# Altium PCB LEDArrayFPC_24LED.PcbDoc (part 1 of 2)
Units mil, origin at the board's own origin, x right, y up, seen from the top; angles counter-clockwise.
Board outline 6000 x 4000 mil, 2 copper layers (Top Layer, Bottom Layer); 48 components, 25 nets, 486 pads, 144 vias.
Unrouted connection lines stored in the file: 29.
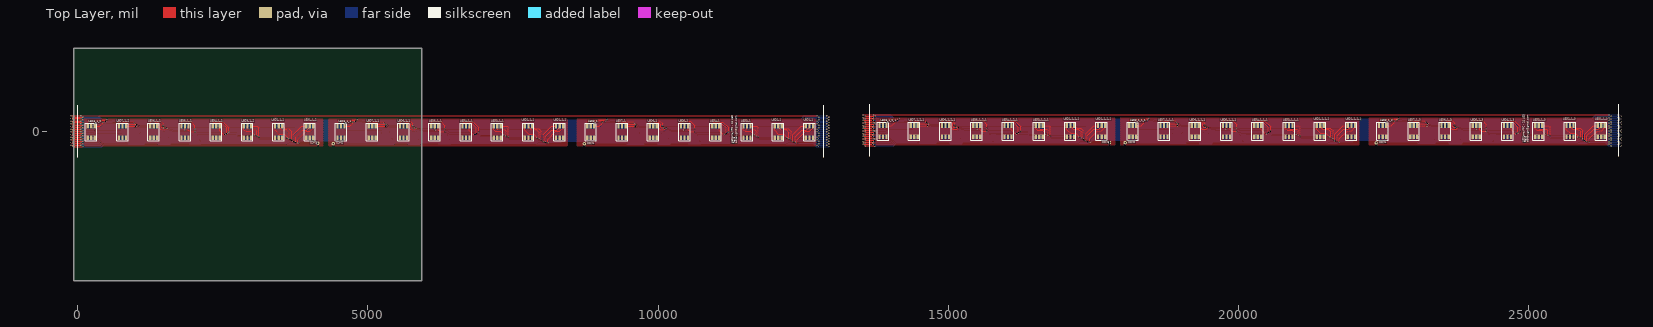
[diagram p0: Top Layer view]
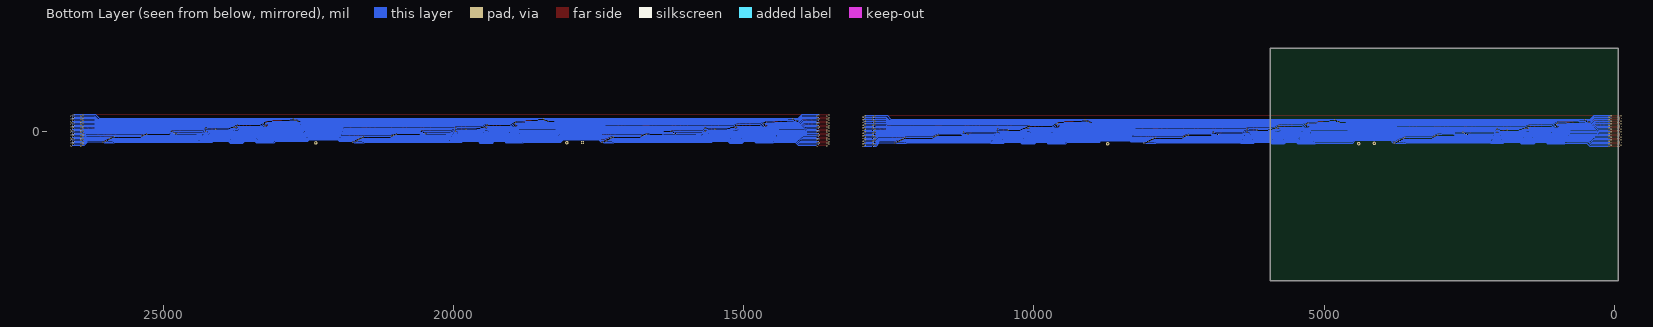
[diagram p1: Bottom Layer view, seen from below]

## Layer stack, top to bottom
Top Layer: signal copper 1.4
Dielectric: dielectric 12.6, FR-4, Dk 4.8
Bottom Layer: signal copper 1.4

## Board outline
-70,-2573.5 5930,-2573.5 5930,1426.5 -70,1426.5

## Design rules (kind name [scope] priority, off if disabled: settings)
Clearance [All] p1: gap=6
MinimumSolderMaskSliver [All] p1: minsoldermaskwidth=3.94
PolygonConnect [All] p1: connectstyle=Relief reliefconductorwidth=10 reliefentries=4 polygonreliefangle="90 Angle"
RoutingVias [All] p1: holewidth=28 width=50 viastyle="Through Hole" minholewidth=7.87 minwidth=19.68 maxholewidth=28 maxwidth=50
SilkscreenOverComponentPads [All] p1: minsilkscreentomaskgap=10
SolderMaskExpansion [All] p1: expansion=4
Width [All] p1: maxlimit=100 minlimit=6 preferedwidth=10 minimp=50.000000 maximp=50.000000 favimp=50.000000
26 further rules are at their usual default settings.

## Components (designator, comment, footprint, x,y, rotation, side; value= is the part's Value field where it differs from the comment)
LED1_1 "5050RGBLED" "5050 CRGBLED" 12608.32,-15.35 r90 top (schematic designator LED1)
LED1_1_1 "5050RGBLED" "5050 CRGBLED" 8303.75,-15.35 r90 top (schematic designator LED1)
LED1_1_1_1 "5050RGBLED" "5050 CRGBLED" 21948.75,-0.35 r90 top (schematic designator LED1)
LED1_1_2 "5050RGBLED" "5050 CRGBLED" 3999.19,-15.35 r90 top (schematic designator LED1)
LED1_1_2_1 "5050RGBLED" "5050 CRGBLED" 17644.19,-0.35 r90 top (schematic designator LED1)
LED1_1_3 "5050RGBLED" "5050 CRGBLED" 26253.32,-0.35 r90 top (schematic designator LED1)
LED2_1 "5050RGBLED" "5050 CRGBLED" 12070.25,-15.35 r90 top (schematic designator LED2)
LED2_1_1 "5050RGBLED" "5050 CRGBLED" 7765.68,-15.35 r90 top (schematic designator LED2)
LED2_1_1_1 "5050RGBLED" "5050 CRGBLED" 21410.68,-0.35 r90 top (schematic designator LED2)
LED2_1_2 "5050RGBLED" "5050 CRGBLED" 3461.11,-15.35 r90 top (schematic designator LED2)
LED2_1_2_1 "5050RGBLED" "5050 CRGBLED" 17106.11,-0.35 r90 top (schematic designator LED2)
LED2_1_3 "5050RGBLED" "5050 CRGBLED" 25715.25,-0.35 r90 top (schematic designator LED2)
LED3_1 "5050RGBLED" "5050 CRGBLED" 11532.18,-15.35 r90 top (schematic designator LED3)
LED3_1_1 "5050RGBLED" "5050 CRGBLED" 7227.61,-15.35 r90 top (schematic designator LED3)
LED3_1_1_1 "5050RGBLED" "5050 CRGBLED" 20872.61,-0.35 r90 top (schematic designator LED3)
LED3_1_2 "5050RGBLED" "5050 CRGBLED" 2923.04,-15.35 r90 top (schematic designator LED3)
LED3_1_2_1 "5050RGBLED" "5050 CRGBLED" 16568.04,-0.35 r90 top (schematic designator LED3)
LED3_1_3 "5050RGBLED" "5050 CRGBLED" 25177.18,-0.35 r90 top (schematic designator LED3)
LED4_1 "5050RGBLED" "5050 CRGBLED" 10994.11,-15.35 r90 top (schematic designator LED4)
LED4_1_1 "5050RGBLED" "5050 CRGBLED" 6689.54,-15.35 r90 top (schematic designator LED4)
LED4_1_1_1 "5050RGBLED" "5050 CRGBLED" 20334.54,-0.35 r90 top (schematic designator LED4)
LED4_1_2 "5050RGBLED" "5050 CRGBLED" 2384.97,-15.35 r90 top (schematic designator LED4)
LED4_1_2_1 "5050RGBLED" "5050 CRGBLED" 16029.97,-0.35 r90 top (schematic designator LED4)
LED4_1_3 "5050RGBLED" "5050 CRGBLED" 24639.11,-0.35 r90 top (schematic designator LED4)
LED5_1 "5050RGBLED" "5050 CRGBLED" 10456.04,-15.35 r90 top (schematic designator LED5)
LED5_1_1 "5050RGBLED" "5050 CRGBLED" 6151.47,-15.35 r90 top (schematic designator LED5)
LED5_1_1_1 "5050RGBLED" "5050 CRGBLED" 19796.47,-0.35 r90 top (schematic designator LED5)
LED5_1_2 "5050RGBLED" "5050 CRGBLED" 1846.9,-15.35 r90 top (schematic designator LED5)
LED5_1_2_1 "5050RGBLED" "5050 CRGBLED" 15491.9,-0.35 r90 top (schematic designator LED5)
LED5_1_3 "5050RGBLED" "5050 CRGBLED" 24101.04,-0.35 r90 top (schematic designator LED5)
LED6_1 "5050RGBLED" "5050 CRGBLED" 9917.97,-15.35 r90 top (schematic designator LED6)
LED6_1_1 "5050RGBLED" "5050 CRGBLED" 5613.4,-15.35 r90 top (schematic designator LED6)
LED6_1_1_1 "5050RGBLED" "5050 CRGBLED" 19258.4,-0.35 r90 top (schematic designator LED6)
LED6_1_2 "5050RGBLED" "5050 CRGBLED" 1308.83,-15.35 r90 top (schematic designator LED6)
LED6_1_2_1 "5050RGBLED" "5050 CRGBLED" 14953.83,-0.35 r90 top (schematic designator LED6)
LED6_1_3 "5050RGBLED" "5050 CRGBLED" 23562.97,-0.35 r90 top (schematic designator LED6)
LED7_1 "5050RGBLED" "5050 CRGBLED" 9379.9,-15.35 r90 top (schematic designator LED7)
LED7_1_1 "5050RGBLED" "5050 CRGBLED" 5075.33,-15.35 r90 top (schematic designator LED7)
LED7_1_1_1 "5050RGBLED" "5050 CRGBLED" 18720.33,-0.35 r90 top (schematic designator LED7)
LED7_1_2 "5050RGBLED" "5050 CRGBLED" 770.76,-15.35 r90 top (schematic designator LED7)
LED7_1_2_1 "5050RGBLED" "5050 CRGBLED" 14415.76,-0.35 r90 top (schematic designator LED7)
LED7_1_3 "5050RGBLED" "5050 CRGBLED" 23024.9,-0.35 r90 top (schematic designator LED7)
LED8_1 "5050RGBLED" "5050 CRGBLED" 8841.82,-15.35 r90 top (schematic designator LED8)
LED8_1_1 "5050RGBLED" "5050 CRGBLED" 4537.26,-15.35 r90 top (schematic designator LED8)
LED8_1_1_1 "5050RGBLED" "5050 CRGBLED" 18182.26,-0.35 r90 top (schematic designator LED8)
LED8_1_2 "5050RGBLED" "5050 CRGBLED" 232.69,-15.35 r90 top (schematic designator LED8)
LED8_1_2_1 "5050RGBLED" "5050 CRGBLED" 13877.69,-0.35 r90 top (schematic designator LED8)
LED8_1_3 "5050RGBLED" "5050 CRGBLED" 22486.82,-0.35 r90 top (schematic designator LED8)

## Footprints (in the part's own frame and the unit in brackets; to place one, negate y for a bottom-side part, rotate by r counter-clockwise, add the part's x,y. Pads: shape width x height; smd on the part's side, far side on the other; paste and mask are expansions set on the pad)
"5050 CRGBLED" [mm] "5050 RGBLED"
  rect 2x1 smd: 1(-2.5,1.55) 2(2.5,1.55) 3(-2.5,0) 4(2.5,0) 5(-2.5,-1.55) 6(2.5,-1.55)
  silkscreen extent -3.85,-2.45 3.9,2.55

## Part data
LED1_1 LED1_1_1 LED1_1_1_1 LED1_1_2 LED1_1_2_1 LED1_1_3 LED2_1 LED2_1_1 LED2_1_1_1 LED2_1_2 LED2_1_2_1 LED2_1_3 LED3_1 LED3_1_1 LED3_1_1_1 LED3_1_2 LED3_1_2_1 LED3_1_3 LED4_1 LED4_1_1 LED4_1_1_1 LED4_1_2 LED4_1_2_1 LED4_1_3 LED5_1 LED5_1_1 LED5_1_1_1 LED5_1_2 LED5_1_2_1 LED5_1_3 LED6_1 LED6_1_1 LED6_1_1_1 LED6_1_2 LED6_1_2_1 LED6_1_3 LED7_1 LED7_1_1 LED7_1_1_1 LED7_1_2 LED7_1_2_1 LED7_1_3 LED8_1 LED8_1_1 LED8_1_1_1 LED8_1_2 LED8_1_2_1 LED8_1_3: "5050 RGB LED"

## Free pads (board coordinates)
  round 59.06 hole 27.56: 1(4135,-209.72) 1(4404.25,-213.5) 1(8730,-216.88) 1(17780,-194.72) 1(18049.25,-198.5) 1(22375,-201.88)
  oval 31.5x23.62 hole 11.81: ""(-111,-241) ""(-111,-195) ""(-111,-149) ""(-111,-103) ""(-111,-57) ""(-111,-11) ""(-111,35) ""(-111,81) ""(-111,127) ""(-111,173) ""(-111,219) ""(-111,265) ""(-76,-264) ""(-76,-218) ""(-76,-172) ""(-76,-126) ""(-76,-80) ""(-76,-34) ""(-76,12) ""(-76,58) ""(-76,104) ""(-76,150) ""(-76,196) ""(-76,242) ""(54,-241) ""(54,-195) ""(54,-149) ""(54,-103) ""(54,-57) ""(54,-11) ""(54,35) ""(54,81) ""(54,127) ""(54,173) ""(54,219) ""(54,265) ""(89,-264) ""(89,-218) ""(89,-172) ""(89,-126) ""(89,-80) ""(89,-34) ""(89,12) ""(89,58) ""(89,104) ""(89,150) ""(89,196) ""(89,242) ""(12744,-241) ""(12744,-195) ""(12744,-149) ""(12744,-103) ""(12744,-57) ""(12744,-11) ""(12744,35) ""(12744,81) ""(12744,127) ""(12744,173) ""(12744,219) ""(12744,265) ""(12779,-264) ""(12779,-218) ""(12779,-172) ""(12779,-126) ""(12779,-80) ""(12779,-34) ""(12779,12) ""(12779,58) ""(12779,104) ""(12779,150) ""(12779,196) ""(12779,242) ""(12909,-241) ""(12909,-195) ""(12909,-149) ""(12909,-103) ""(12909,-57) ""(12909,-11) ""(12909,35) ""(12909,81) ""(12909,127) ""(12909,173) ""(12909,219) ""(12909,265) ""(12944,-264) ""(12944,-218) ""(12944,-172) ""(12944,-126) ""(12944,-80) ""(12944,-34) ""(12944,12) ""(12944,58) ""(12944,104) ""(12944,150) ""(12944,196) ""(12944,242) ""(13534,-226) ""(13534,-180) ""(13534,-134) ""(13534,-88) ""(13534,-42) ""(13534,4) ""(13534,50) ""(13534,96) ""(13534,142) ""(13534,188) ""(13534,234) ""(13534,280) ""(13569,-249) ""(13569,-203) ""(13569,-157) ""(13569,-111) ""(13569,-65) ""(13569,-19) ""(13569,27) ""(13569,73) ""(13569,119) ""(13569,165) ""(13569,211) ""(13569,257) ""(13699,-226) ""(13699,-180) ""(13699,-134) ""(13699,-88) ""(13699,-42) ""(13699,4) ""(13699,50) ""(13699,96) ""(13699,142) ""(13699,188) ""(13699,234) ""(13699,280) ""(13734,-249) ""(13734,-203) ""(13734,-157) ""(13734,-111) ""(13734,-65) ""(13734,-19) ""(13734,27) ""(13734,73) ""(13734,119) ""(13734,165) ""(13734,211) ""(13734,257) ""(26389,-226) ""(26389,-180) ""(26389,-134) ""(26389,-88) ""(26389,-42) ""(26389,4) ""(26389,50) ""(26389,96) ""(26389,142) ""(26389,188) ""(26389,234) ""(26389,280) ""(26424,-249) ""(26424,-203) ""(26424,-157) ""(26424,-111) ""(26424,-65) ""(26424,-19) ""(26424,27) ""(26424,73) ""(26424,119) ""(26424,165) ""(26424,211) ""(26424,257) ""(26554,-226) ""(26554,-180) ""(26554,-134) ""(26554,-88) ""(26554,-42) ""(26554,4) ""(26554,50) ""(26554,96) ""(26554,142) ""(26554,188) ""(26554,234) ""(26554,280) ""(26589,-249) ""(26589,-203) ""(26589,-157) ""(26589,-111) ""(26589,-65) ""(26589,-19) ""(26589,27) ""(26589,73) ""(26589,119) ""(26589,165) ""(26589,211) ""(26589,257)

## Via types
v1: diameter 23.62, hole 11.81, Top Layer to Bottom Layer, 144 vias

## Nets (pads, with @x,y where several pads share a name; then routed paths per layer and width w, separated by ;. In a path a pad name is that pad's centre, name@x,y a point inside that pad or via, vN(x,y) a via of type N, cw(c..) or ccw(c..) an arc to the next point about the centre after c; other vN are vias at no path point)
COM1: LED1_1.1 LED1_1.3 LED1_1.5 LED1_1_1.1 LED1_1_1.3 LED1_1_1.5 LED1_1_1_1.1 LED1_1_1_1.3 LED1_1_1_1.5 LED1_1_2.1 LED1_1_2.3 LED1_1_2.5 LED1_1_2_1.1 LED1_1_2_1.3 LED1_1_2_1.5 LED1_1_3.1 LED1_1_3.3 LED1_1_3.5 LED2_1.1 LED2_1.3 LED2_1.5 LED2_1_1.1 LED2_1_1.3 LED2_1_1.5 LED2_1_1_1.1 LED2_1_1_1.3 LED2_1_1_1.5 LED2_1_2.1 LED2_1_2.3 LED2_1_2.5 LED2_1_2_1.1 LED2_1_2_1.3 LED2_1_2_1.5 LED2_1_3.1 LED2_1_3.3 LED2_1_3.5 LED3_1.1 LED3_1.3 LED3_1.5 LED3_1_1.1 LED3_1_1.3 LED3_1_1.5 LED3_1_1_1.1 LED3_1_1_1.3 LED3_1_1_1.5 LED3_1_2.1 LED3_1_2.3 LED3_1_2.5 LED3_1_2_1.1 LED3_1_2_1.3 LED3_1_2_1.5 LED3_1_3.1 LED3_1_3.3 LED3_1_3.5 LED4_1.1 LED4_1.3 LED4_1.5 LED4_1_1.1 LED4_1_1.3 LED4_1_1.5 LED4_1_1_1.1 LED4_1_1_1.3 LED4_1_1_1.5 LED4_1_2.1 LED4_1_2.3 LED4_1_2.5 LED4_1_2_1.1 LED4_1_2_1.3 LED4_1_2_1.5 LED4_1_3.1 LED4_1_3.3 LED4_1_3.5 LED5_1.1 LED5_1.3 LED5_1.5 LED5_1_1.1 LED5_1_1.3 LED5_1_1.5 LED5_1_1_1.1 LED5_1_1_1.3 LED5_1_1_1.5 LED5_1_2.1 LED5_1_2.3 LED5_1_2.5 LED5_1_2_1.1 LED5_1_2_1.3 LED5_1_2_1.5 LED5_1_3.1 LED5_1_3.3 LED5_1_3.5 LED6_1.1 LED6_1.3 LED6_1.5 LED6_1_1.1 LED6_1_1.3 LED6_1_1.5 LED6_1_1_1.1 LED6_1_1_1.3 LED6_1_1_1.5 LED6_1_2.1 LED6_1_2.3 LED6_1_2.5 LED6_1_2_1.1 LED6_1_2_1.3 LED6_1_2_1.5 LED6_1_3.1 LED6_1_3.3 LED6_1_3.5 LED7_1.1 LED7_1.3 LED7_1.5 LED7_1_1.1 LED7_1_1.3 LED7_1_1.5 LED7_1_1_1.1 LED7_1_1_1.3 LED7_1_1_1.5 LED7_1_2.1 LED7_1_2.3 LED7_1_2.5 LED7_1_2_1.1 LED7_1_2_1.3 LED7_1_2_1.5 LED7_1_3.1 LED7_1_3.3 LED7_1_3.5 LED8_1.1 LED8_1.3 LED8_1.5 LED8_1_1.1 LED8_1_1.3 LED8_1_1.5 LED8_1_1_1.1 LED8_1_1_1.3 LED8_1_1_1.5 LED8_1_2.1 LED8_1_2.3 LED8_1_2.5 LED8_1_2_1.1 LED8_1_2_1.3 LED8_1_2_1.5 LED8_1_3.1 LED8_1_3.3 LED8_1_3.5 pad.1 | length 42.6
  Top Layer w10: LED2_1_2.5@3522.14,-120.87 LED2_1_2.5@3522.14,-113.77 ; LED2_1_1.5@7826.7,-120.87 LED2_1_1.5@7826.71,-113.77 ; LED2_1.5@12131.27,-120.87 LED2_1.5@12131.27,-113.77 ; LED2_1_2_1.5@17167.14,-105.87 LED2_1_2_1.5@17167.14,-98.77 ; LED2_1_1_1.5@21471.71,-105.87 LED2_1_1_1.5@21471.71,-98.77 ; LED2_1_3.5@25776.27,-105.87 LED2_1_3.5@25776.27,-98.77
L1: LED1_1.6 LED1_1_1.6 LED1_1_1_1.6 LED1_1_2.6 LED1_1_2_1.6 LED1_1_3.6 pad.@89,-264 pad.@12779,-264 pad.@12944,-264 pad.@13569,-249 pad.@13734,-249 pad.@26424,-249 pad.@26589,-249 pad.@-76,-264 | length 29243.6
  Top Layer w10: 39,-264 pad.@89,-264 ; v1(3793.09,-203.5) 3793.09,-147.34 3935.83,-4.6 4004.85,-4.6 4060.21,50.76 LED1_1_2.6@4060.21,83.08 ; v1(8097.66,-203.5) 8097.66,-147.34 8240.4,-4.6 8309.42,-4.6 8364.78,50.76 LED1_1_1.6@8364.78,83.08 ; v1(12402.22,-203.5) 12402.22,-147.34 12544.97,-4.6 12613.99,-4.6 12669.34,50.76 LED1_1.6@12669.34,83.08 ; 13684,-249 pad.@13734,-249 ; v1(17438.09,-188.5) 17438.09,-132.34 17580.83,10.4 17649.85,10.4 17705.21,65.76 LED1_1_2_1.6@17705.21,98.08 ; v1(21742.66,-188.5) 21742.66,-132.34 21885.4,10.4 21954.42,10.4 22009.78,65.76 LED1_1_1_1.6@22009.78,98.08 ; v1(26047.22,-188.5) 26047.22,-132.34 26189.97,10.4 26258.99,10.4 26314.35,65.76 LED1_1_3.6@26314.34,98.08
  Top Layer w15: pad.@-76,-264 39,-264 ; pad.@13569,-249 13684,-249
  Bottom Layer w10: pad.@89,-264 411.61,-264 463.11,-212.5 850.91,-212.5 859.76,-221.34 1141.56,-221.34 1164.4,-198.5 1358.85,-198.5 1388.69,-228.34 1591.52,-228.34 1621.37,-198.5 1899.73,-198.5 1917.73,-216.5 2122.48,-216.5 2129.49,-209.5 2130.49,-210.5 3594.09,-210.5 3604.09,-220.5 3756.35,-220.5 3773.35,-203.5 v1(3793.09,-203.5) 3811,-203.5 3846,-168.5 4472.39,-168.5 4516.39,-212.5 5155.48,-212.5 5164.33,-221.34 5446.13,-221.34 5468.97,-198.5 5663.42,-198.5 5693.26,-228.34 5896.09,-228.34 5925.93,-198.5 6204.3,-198.5 6222.3,-216.5 6427.05,-216.5 6434.05,-209.5 6435.05,-210.5 7898.66,-210.5 7908.66,-220.5 8060.92,-220.5 8077.92,-203.5 v1(8097.66,-203.5) 8097.66,-200.5 8103.66,-194.5 8322.14,-194.5 8343.14,-173.5 8853.65,-173.5 8876.36,-196.22 9434,-196.22 9459.13,-221.34 9750.69,-221.34 9773.54,-198.5 9967.98,-198.5 9997.83,-228.34 10200.66,-228.34 10230.5,-198.5 10508.87,-198.5 10526.87,-216.5 10731.62,-216.5 10738.62,-209.5 10739.62,-210.5 12203.22,-210.5 12213.22,-220.5 12365.48,-220.5 12382.48,-203.5 v1(12402.22,-203.5) 12670.3,-203.5 12730.61,-263.81 12778.81,-263.81 pad.@12779,-264 ; 12894,-264 pad.@12944,-264 ; pad.@13734,-249 14056.61,-249 14108.11,-197.5 14495.91,-197.5 14504.76,-206.34 14786.56,-206.34 14809.4,-183.5 15003.85,-183.5 15033.69,-213.34 15236.52,-213.34 15266.37,-183.5 15544.73,-183.5 15562.73,-201.5 15767.48,-201.5 15774.49,-194.5 15775.49,-195.5 17239.09,-195.5 17249.09,-205.5 17401.35,-205.5 17418.35,-188.5 v1(17438.09,-188.5) 17456,-188.5 17491,-153.5 18117.39,-153.5 18161.39,-197.5 18800.48,-197.5 18809.33,-206.34 19091.13,-206.34 19113.97,-183.5 19308.42,-183.5 19338.26,-213.34 19541.09,-213.34 19570.93,-183.5 19849.3,-183.5 19867.3,-201.5 20072.05,-201.5 20079.05,-194.5 20080.05,-195.5 21543.66,-195.5 21553.66,-205.5 21705.92,-205.5 21722.92,-188.5 v1(21742.66,-188.5) 21742.66,-185.5 21748.66,-179.5 21967.14,-179.5 21988.14,-158.5 22498.65,-158.5 22521.36,-181.22 23079,-181.22 23104.13,-206.34 23395.69,-206.34 23418.54,-183.5 23612.98,-183.5 23642.83,-213.34 23845.66,-213.34 23875.5,-183.5 24153.87,-183.5 24171.87,-201.5 24376.62,-201.5 24383.62,-194.5 24384.62,-195.5 25848.22,-195.5 25858.22,-205.5 26010.48,-205.5 26027.48,-188.5 v1(26047.22,-188.5) 26315.3,-188.5 26375.61,-248.81 26423.81,-248.81 pad.@26424,-249 ; 26539,-249 pad.@26589,-249
  Bottom Layer w15: pad.@12779,-264 12894,-264 ; pad.@26424,-249 26539,-249
L2: LED1_1.4 LED1_1_1.4 LED1_1_1_1.4 LED1_1_2.4 LED1_1_2_1.4 LED1_1_3.4 pad.@54,-241 pad.@12744,-241 pad.@12909,-241 pad.@13534,-226 pad.@13699,-226 pad.@26389,-226 pad.@26554,-226 pad.@-111,-241 | length 29216.6
  Top Layer w10: pad.@-111,-241 -56,-241 ; v1(3752.09,-192.5) 3752.09,-95.36 3866.86,19.41 3949.1,19.41 3999.19,69.49 LED1_1_2.4@3999.18,83.08 ; v1(8056.66,-192.5) 8056.66,-95.36 8171.43,19.41 8253.67,19.41 8303.75,69.49 LED1_1_1.4@8303.75,83.08 ; v1(12361.22,-192.5) 12361.22,-95.36 12476,19.41 12558.24,19.41 12608.32,69.49 LED1_1.4@12608.32,83.08 ; pad.@13534,-226 13589,-226 ; v1(17397.09,-177.5) 17397.09,-80.36 17511.86,34.41 17594.1,34.41 17644.19,84.49 LED1_1_2_1.4@17644.18,98.08 ; v1(21701.66,-177.5) 21701.66,-80.36 21816.43,34.41 21898.67,34.41 21948.75,84.49 LED1_1_1_1.4@21948.75,98.08 ; v1(26006.22,-177.5) 26006.22,-80.36 26121,34.41 26203.24,34.41 26253.32,84.49 LED1_1_3.4@26253.32,98.08
  Top Layer w15: -56,-241 pad.@54,-241 ; 13589,-226 pad.@13699,-226
  Bottom Layer w10: pad.@54,-241 396.61,-241 443.11,-194.5 820.09,-194.5 835.09,-179.5 840.54,-179.5 866.38,-205.34 1134.93,-205.34 1157.77,-182.5 1365.48,-182.5 1395.32,-212.34 1584.9,-212.34 1614.74,-182.5 1906.36,-182.5 1924.36,-200.5 2115.86,-200.5 2122.86,-193.5 2136.11,-193.5 2137.11,-194.5 3624.09,-194.5 3634.09,-204.5 3740.09,-204.5 v1(3752.09,-192.5) 3769.09,-175.5 3816.09,-175.5 3828.09,-163.5 3828.37,-163.5 3839.37,-152.5 4481.2,-152.5 4523.2,-194.5 5160.11,-194.5 5170.95,-205.34 5439.5,-205.34 5462.34,-182.5 5670.04,-182.5 5699.89,-212.34 5889.46,-212.34 5919.31,-182.5 6210.93,-182.5 6228.93,-200.5 6420.42,-200.5 6427.42,-193.5 6440.68,-193.5 6441.68,-194.5 7928.66,-194.5 7938.66,-204.5 8044.66,-204.5 v1(8056.66,-192.5) 8056.66,-184.5 8062.66,-178.5 8315.51,-178.5 8336.51,-157.5 8860.28,-157.5 8882.99,-180.22 9450,-180.22 9475.13,-205.34 9744.07,-205.34 9766.91,-182.5 9974.61,-182.5 10004.45,-212.34 10194.03,-212.34 10223.88,-182.5 10515.49,-182.5 10533.49,-200.5 10724.99,-200.5 10731.99,-193.5 10745.25,-193.5 10746.25,-194.5 12233.22,-194.5 12243.22,-204.5 12349.22,-204.5 v1(12361.22,-192.5) 12378.22,-175.5 12665.68,-175.5 12723.99,-233.81 12736.81,-233.81 pad.@12744,-241 12799,-241 ; pad.@13699,-226 14041.61,-226 14088.11,-179.5 14465.09,-179.5 14480.09,-164.5 14485.54,-164.5 14511.38,-190.34 14779.93,-190.34 14802.77,-167.5 15010.48,-167.5 15040.32,-197.34 15229.9,-197.34 15259.74,-167.5 15551.36,-167.5 15569.36,-185.5 15760.86,-185.5 15767.86,-178.5 15781.11,-178.5 15782.11,-179.5 17269.09,-179.5 17279.09,-189.5 17385.09,-189.5 v1(17397.09,-177.5) 17414.09,-160.5 17461.09,-160.5 17473.09,-148.5 17473.37,-148.5 17484.37,-137.5 18126.2,-137.5 18168.2,-179.5 18805.11,-179.5 18815.95,-190.34 19084.5,-190.34 19107.34,-167.5 19315.04,-167.5 19344.89,-197.34 19534.46,-197.34 19564.31,-167.5 19855.93,-167.5 19873.93,-185.5 20065.42,-185.5 20072.42,-178.5 20085.68,-178.5 20086.68,-179.5 21573.66,-179.5 21583.66,-189.5 21689.66,-189.5 v1(21701.66,-177.5) 21701.66,-169.5 21707.66,-163.5 21960.51,-163.5 21981.51,-142.5 22505.28,-142.5 22527.99,-165.22 23095,-165.22 23120.13,-190.34 23389.07,-190.34 23411.91,-167.5 23619.61,-167.5 23649.45,-197.34 23839.03,-197.34 23868.88,-167.5 24160.49,-167.5 24178.49,-185.5 24369.99,-185.5 24376.99,-178.5 24390.25,-178.5 24391.25,-179.5 25878.22,-179.5 25888.22,-189.5 25994.22,-189.5 v1(26006.22,-177.5) 26023.22,-160.5 26310.68,-160.5 26368.99,-218.81 26381.81,-218.81 pad.@26389,-226 26444,-226
  Bottom Layer w15: 12799,-241 pad.@12909,-241 ; 26444,-226 pad.@26554,-226
L3: LED1_1.2 LED1_1_1.2 LED1_1_1_1.2 LED1_1_2.2 LED1_1_2_1.2 LED1_1_3.2 pad.@89,-218 pad.@12779,-218 pad.@12944,-218 pad.@13569,-203 pad.@13734,-203 pad.@26424,-203 pad.@26589,-203 pad.@-76,-218 | length 29020.8
  Top Layer w10: 39,-218 pad.@89,-218 ; v1(3715.09,-178.5) 3715.09,-63.36 3860.86,82.41 3937.49,82.41 LED1_1_2.2@3938.16,83.08 ; v1(8019.66,-178.5) 8019.66,-63.36 8165.43,82.41 8242.06,82.41 LED1_1_1.2@8242.73,83.08 ; v1(12324.22,-178.5) 12324.22,-63.36 12470,82.41 12546.63,82.41 LED1_1.2@12547.3,83.08 ; 13684,-203 pad.@13734,-203 ; v1(17360.09,-163.5) 17360.09,-48.36 17505.86,97.41 17582.49,97.41 LED1_1_2_1.2@17583.16,98.08 ; v1(21664.66,-163.5) 21664.66,-48.36 21810.43,97.41 21887.06,97.41 LED1_1_1_1.2@21887.73,98.08 ; v1(25969.22,-163.5) 25969.22,-48.36 26115,97.41 26191.63,97.41 LED1_1_3.2@26192.3,98.08
  Top Layer w15: pad.@-76,-218 39,-218 ; pad.@13569,-203 13684,-203
  Bottom Layer w10: pad.@89,-218 388.61,-218 428.11,-178.5 813.46,-178.5 828.46,-163.5 847.17,-163.5 873.01,-189.34 1128.3,-189.34 1151.15,-166.5 1372.1,-166.5 1401.95,-196.34 1578.27,-196.34 1608.11,-166.5 1912.98,-166.5 1929.98,-183.5 2110.23,-183.5 2124.23,-169.5 2134.74,-169.5 2143.74,-178.5 v1(3715.09,-178.5) 3740.09,-153.5 3815.46,-153.5 3821.46,-147.5 3821.75,-147.5 3832.75,-136.5 4492.49,-136.5 4534.49,-178.5 5166.74,-178.5 5177.58,-189.34 5432.87,-189.34 5455.71,-166.5 5676.67,-166.5 5706.51,-196.34 5882.84,-196.34 5912.68,-166.5 6217.55,-166.5 6234.55,-183.5 6414.8,-183.5 6428.8,-169.5 6439.31,-169.5 6448.31,-178.5 v1(8019.66,-178.5) 8019.66,-175.5 8032.66,-162.5 8308.88,-162.5 8329.88,-141.5 8866.9,-141.5 8888.94,-163.53 9455.95,-163.53 9481.75,-189.34 9737.44,-189.34 9760.28,-166.5 9981.24,-166.5 10011.08,-196.34 10187.41,-196.34 10217.25,-166.5 10522.12,-166.5 10539.12,-183.5 10719.37,-183.5 10733.37,-169.5 10743.88,-169.5 10752.88,-178.5 v1(12324.22,-178.5) 12343.22,-159.5 12672.3,-159.5 12730.61,-217.81 12778.81,-217.81 pad.@12779,-218 ; 12894,-218 pad.@12944,-218 ; pad.@13734,-203 14033.61,-203 14073.11,-163.5 14458.46,-163.5 14473.46,-148.5 14492.17,-148.5 14518.01,-174.34 14773.3,-174.34 14796.15,-151.5 15017.1,-151.5 15046.95,-181.34 15223.27,-181.34 15253.11,-151.5 15557.98,-151.5 15574.98,-168.5 15755.23,-168.5 15769.23,-154.5 15779.74,-154.5 15788.74,-163.5 v1(17360.09,-163.5) 17385.09,-138.5 17460.46,-138.5 17466.46,-132.5 17466.75,-132.5 17477.75,-121.5 18137.49,-121.5 18179.49,-163.5 18811.74,-163.5 18822.58,-174.34 19077.87,-174.34 19100.71,-151.5 19321.67,-151.5 19351.51,-181.34 19527.84,-181.34 19557.68,-151.5 19862.55,-151.5 19879.55,-168.5 20059.8,-168.5 20073.8,-154.5 20084.31,-154.5 20093.31,-163.5 v1(21664.66,-163.5) 21664.66,-160.5 21677.66,-147.5 21953.88,-147.5 21974.88,-126.5 22511.9,-126.5 22533.94,-148.53 23100.95,-148.53 23126.75,-174.34 23382.44,-174.34 23405.28,-151.5 23626.24,-151.5 23656.08,-181.34 23832.41,-181.34 23862.25,-151.5 24167.12,-151.5 24184.12,-168.5 24364.37,-168.5 24378.37,-154.5 24388.88,-154.5 24397.88,-163.5 v1(25969.22,-163.5) 25988.22,-144.5 26317.3,-144.5 26375.61,-202.81 26423.81,-202.81 pad.@26424,-203 ; 26539,-203 pad.@26589,-203
  Bottom Layer w15: pad.@12779,-218 12894,-218 ; pad.@26424,-203 26539,-203
L4: LED2_1.6 LED2_1_1.6 LED2_1_1_1.6 LED2_1_2.6 LED2_1_2_1.6 LED2_1_3.6 pad.@54,-195 pad.@12744,-195 pad.@12909,-195 pad.@13534,-180 pad.@13699,-180 pad.@26389,-180 pad.@26554,-180 pad.@-111,-195 | length 28687.4
  Top Layer w10: pad.@-111,-195 -56,-195 ; LED2_1_2.6@3522.14,83.08 3566.81,38.41 3637.47,38.41 3683.09,-7.21 v1(3683.09,-155.5) ; LED2_1_1.6@7826.71,83.08 7871.38,38.41 7942.04,38.41 7987.66,-7.21 v1(7987.66,-155.5) ; LED2_1.6@12131.27,83.08 12175.94,38.41 12246.61,38.41 12292.22,-7.21 v1(12292.22,-155.5) ; pad.@13534,-180 13589,-180 ; LED2_1_2_1.6@17167.14,98.08 17211.81,53.41 17282.47,53.41 17328.09,7.79 v1(17328.09,-140.5) ; LED2_1_1_1.6@21471.71,98.08 21516.38,53.41 21587.04,53.41 21632.66,7.79 v1(21632.66,-140.5) ; LED2_1_3.6@25776.27,98.08 25820.94,53.41 25891.61,53.41 25937.22,7.79 v1(25937.22,-140.5)
  Top Layer w15: -56,-195 pad.@54,-195 ; 13589,-180 pad.@13699,-180
  Bottom Layer w10: pad.@54,-195 370.61,-195 403.11,-162.5 806.83,-162.5 821.83,-147.5 853.8,-147.5 879.64,-173.34 1121.68,-173.34 1144.52,-150.5 1378.73,-150.5 1408.57,-180.34 1571.64,-180.34 1601.48,-150.5 1919.61,-150.5 1936.61,-167.5 2103.6,-167.5 2117.6,-153.5 2141.37,-153.5 2149.37,-161.5 3677.09,-161.5 v1(3683.09,-155.5) 3701.09,-137.5 3808.83,-137.5 3814.83,-131.5 3815.12,-131.5 3826.12,-120.5 4499.12,-120.5 4541.12,-162.5 5173.37,-162.5 5184.21,-173.34 5426.24,-173.34 5449.09,-150.5 5683.3,-150.5 5713.14,-180.34 5876.21,-180.34 5906.05,-150.5 6224.18,-150.5 6241.18,-167.5 6408.17,-167.5 6422.17,-153.5 6445.93,-153.5 6453.93,-161.5 7981.66,-161.5 v1(7987.66,-155.5) 7996.66,-146.5 8302.25,-146.5 8323.25,-125.5 8874.16,-125.5 8896.16,-147.5 9462.93,-147.5 9488.78,-173.34 9730.81,-173.34 9753.65,-150.5 9987.87,-150.5 10017.71,-180.34 10180.78,-180.34 10210.62,-150.5 10528.75,-150.5 10545.75,-167.5 10712.74,-167.5 10726.74,-153.5 10750.5,-153.5 10758.5,-161.5 12286.22,-161.5 v1(12292.22,-155.5) 12304.22,-143.5 12679.68,-143.5 12723.99,-187.81 12736.81,-187.81 pad.@12744,-195 12799,-195 ; pad.@13699,-180 14015.61,-180 14048.11,-147.5 14451.83,-147.5 14466.83,-132.5 14498.8,-132.5 14524.64,-158.34 14766.68,-158.34 14789.52,-135.5 15023.73,-135.5 15053.57,-165.34 15216.64,-165.34 15246.48,-135.5 15564.61,-135.5 15581.61,-152.5 15748.6,-152.5 15762.6,-138.5 15786.37,-138.5 15794.37,-146.5 17322.09,-146.5 v1(17328.09,-140.5) 17346.09,-122.5 17453.83,-122.5 17459.83,-116.5 17460.12,-116.5 17471.12,-105.5 18144.12,-105.5 18186.12,-147.5 18818.37,-147.5 18829.21,-158.34 19071.24,-158.34 19094.09,-135.5 19328.3,-135.5 19358.14,-165.34 19521.21,-165.34 19551.05,-135.5 19869.18,-135.5 19886.18,-152.5 20053.17,-152.5 20067.17,-138.5 20090.93,-138.5 20098.93,-146.5 21626.66,-146.5 v1(21632.66,-140.5) 21641.66,-131.5 21947.25,-131.5 21968.25,-110.5 22519.16,-110.5 22541.16,-132.5 23107.93,-132.5 23133.78,-158.34 23375.81,-158.34 23398.65,-135.5 23632.87,-135.5 23662.71,-165.34 23825.78,-165.34 23855.62,-135.5 24173.75,-135.5 24190.75,-152.5 24357.74,-152.5 24371.74,-138.5 24395.5,-138.5 24403.5,-146.5 25931.22,-146.5 v1(25937.22,-140.5) 25949.22,-128.5 26324.68,-128.5 26368.99,-172.81 26381.81,-172.81 pad.@26389,-180 26444,-180
  Bottom Layer w15: 12799,-195 pad.@12909,-195 ; 26444,-180 pad.@26554,-180
L5: LED2_1.4 LED2_1_1.4 LED2_1_1_1.4 LED2_1_2.4 LED2_1_2_1.4 LED2_1_3.4 pad.@89,-172 pad.@12779,-172 pad.@12944,-172 pad.@13569,-157 pad.@13734,-157 pad.@26424,-157 pad.@26589,-157 pad.@-76,-172 | length 28658.9
  Top Layer w10: 39,-172 pad.@89,-172 ; LED2_1_2.4@3461.11,83.08 3491.45,52.74 3491.45,39.15 3508.19,22.41 3596.84,22.41 3645.84,-26.59 3645.84,-130.26 v1(3647.09,-131.5) ; LED2_1_1.4@7765.68,83.08 7796.02,52.74 7796.02,39.15 7812.76,22.41 7901.41,22.41 7950.41,-26.59 7950.41,-130.26 v1(7951.66,-131.5) ; LED2_1.4@12070.25,83.08 12100.59,52.74 12100.59,39.15 12117.33,22.41 12205.98,22.41 12254.98,-26.59 12254.98,-130.26 v1(12256.22,-131.5) ; 13684,-157 pad.@13734,-157 ; LED2_1_2_1.4@17106.11,98.08 17136.45,67.74 17136.45,54.15 17153.19,37.41 17241.84,37.41 17290.84,-11.59 17290.84,-115.26 v1(17292.09,-116.5) ; LED2_1_1_1.4@21410.68,98.08 21441.02,67.74 21441.02,54.15 21457.76,37.41 21546.41,37.41 21595.41,-11.59 21595.41,-115.26 v1(21596.66,-116.5) ; LED2_1_3.4@25715.25,98.08 25745.59,67.74 25745.59,54.15 25762.33,37.41 25850.98,37.41 25899.98,-11.59 25899.98,-115.26 v1(25901.22,-116.5)
  Top Layer w15: pad.@-76,-172 39,-172 ; pad.@13569,-157 13684,-157
  Bottom Layer w10: pad.@89,-172 357.61,-172 383.11,-146.5 800.21,-146.5 815.21,-131.5 860.42,-131.5 886.27,-157.34 1115.05,-157.34 1137.89,-134.5 1385.36,-134.5 1415.2,-164.34 1565.01,-164.34 1594.86,-134.5 1926.24,-134.5 1943.24,-151.5 2096.97,-151.5 2110.97,-137.5 2147.99,-137.5 2155.99,-145.5 3623.97,-145.5 3637.97,-131.5 v1(3647.09,-131.5) 3657.09,-121.5 3802.21,-121.5 3808.21,-115.5 3808.49,-115.5 3819.49,-104.5 4505.75,-104.5 4547.75,-146.5 5179.99,-146.5 5190.83,-157.34 5419.62,-157.34 5442.46,-134.5 5689.93,-134.5 5719.77,-164.34 5869.58,-164.34 5899.42,-134.5 6230.81,-134.5 6247.81,-151.5 6401.54,-151.5 6415.54,-137.5 6452.56,-137.5 6460.56,-145.5 7928.54,-145.5 7942.54,-131.5 v1(7951.66,-131.5) 7952.66,-130.5 8295.63,-130.5 8316.63,-109.5 8881,-109.5 8903,-131.5 9469.56,-131.5 9495.4,-157.34 9724.18,-157.34 9747.03,-134.5 9994.49,-134.5 10024.34,-164.34 10174.15,-164.34 10203.99,-134.5 10535.38,-134.5 10552.38,-151.5 10706.11,-151.5 10720.11,-137.5 10757.13,-137.5 10765.13,-145.5 12233.11,-145.5 12247.11,-131.5 v1(12256.22,-131.5) 12261.22,-126.5 12685.3,-126.5 12730.61,-171.81 12778.81,-171.81 pad.@12779,-172 ; 12894,-172 pad.@12944,-172 ; pad.@13734,-157 14002.61,-157 14028.11,-131.5 14445.21,-131.5 14460.21,-116.5 14505.42,-116.5 14531.27,-142.34 14760.05,-142.34 14782.89,-119.5 15030.36,-119.5 15060.2,-149.34 15210.01,-149.34 15239.86,-119.5 15571.24,-119.5 15588.24,-136.5 15741.97,-136.5 15755.97,-122.5 15792.99,-122.5 15800.99,-130.5 17268.97,-130.5 17282.97,-116.5 v1(17292.09,-116.5) 17302.09,-106.5 17447.21,-106.5 17453.21,-100.5 17453.49,-100.5 17464.49,-89.5 18150.75,-89.5 18192.75,-131.5 18824.99,-131.5 18835.83,-142.34 19064.62,-142.34 19087.46,-119.5 19334.93,-119.5 19364.77,-149.34 19514.58,-149.34 19544.42,-119.5 19875.81,-119.5 19892.81,-136.5 20046.54,-136.5 20060.54,-122.5 20097.56,-122.5 20105.56,-130.5 21573.54,-130.5 21587.54,-116.5 v1(21596.66,-116.5) 21597.66,-115.5 21940.63,-115.5 21961.63,-94.5 22526,-94.5 22548,-116.5 23114.56,-116.5 23140.4,-142.34 23369.18,-142.34 23392.03,-119.5 23639.49,-119.5 23669.34,-149.34 23819.15,-149.34 23848.99,-119.5 24180.38,-119.5 24197.38,-136.5 24351.11,-136.5 24365.11,-122.5 24402.13,-122.5 24410.13,-130.5 25878.11,-130.5 25892.11,-116.5 v1(25901.22,-116.5) 25906.22,-111.5 26330.3,-111.5 26375.61,-156.81 26423.81,-156.81 pad.@26424,-157 ; 26539,-157 pad.@26589,-157
  Bottom Layer w15: pad.@12779,-172 12894,-172 ; pad.@26424,-157 26539,-157
L6: LED2_1.2 LED2_1_1.2 LED2_1_1_1.2 LED2_1_2.2 LED2_1_2_1.2 LED2_1_3.2 pad.@54,-149 pad.@12744,-149 pad.@12909,-149 pad.@13534,-134 pad.@13699,-134 pad.@26389,-134 pad.@26554,-134 pad.@-111,-149 | length 28606.1
  Top Layer w10: pad.@-111,-149 -56,-149 ; LED2_1_2.2@3400.09,83.08 3400.09,12.18 3464.86,-52.59 3555,-52.59 3607.09,-104.68 v1(3607.09,-114.5) ; LED2_1_1.2@7704.66,83.08 7704.66,12.18 7769.43,-52.59 7859.57,-52.59 7911.66,-104.68 v1(7911.66,-114.5) ; LED2_1.2@12009.23,83.08 12009.23,12.18 12074,-52.59 12164.14,-52.59 12216.22,-104.68 v1(12216.22,-114.5) ; pad.@13534,-134 13589,-134 ; LED2_1_2_1.2@17045.09,98.08 17045.09,27.18 17109.86,-37.59 17200,-37.59 17252.09,-89.68 v1(17252.09,-99.5) ; LED2_1_1_1.2@21349.66,98.08 21349.66,27.18 21414.43,-37.59 21504.57,-37.59 21556.66,-89.68 v1(21556.66,-99.5) ; LED2_1_3.2@25654.23,98.08 25654.23,27.18 25719,-37.59 25809.14,-37.59 25861.22,-89.68 v1(25861.22,-99.5)
  Top Layer w15: -56,-149 pad.@54,-149 ; 13589,-134 pad.@13699,-134
  Bottom Layer w10: pad.@54,-149 348.61,-149 368.11,-129.5 794.58,-129.5 808.58,-115.5 867.05,-115.5 892.89,-141.34 1108.42,-141.34 1131.26,-118.5 1391.98,-118.5 1421.83,-148.34 1558.39,-148.34 1588.23,-118.5 1932.87,-118.5 1948.87,-134.5 2091.35,-134.5 2104.35,-121.5 2154.62,-121.5 2162.62,-129.5 3123.09,-129.5 3138.09,-114.5 v1(3607.09,-114.5) 3616.09,-105.5 3795.58,-105.5 3801.58,-99.5 3801.86,-99.5 3812.86,-88.5 4512.37,-88.5 4553.37,-129.5 5185.62,-129.5 5197.46,-141.34 5412.99,-141.34 5435.83,-118.5 5696.55,-118.5 5726.4,-148.34 5862.96,-148.34 5892.8,-118.5 6237.44,-118.5 6253.44,-134.5 6395.92,-134.5 6408.92,-121.5 6459.19,-121.5 6467.19,-129.5 7427.66,-129.5 7442.66,-114.5 v1(7911.66,-114.5) 7917.47,-108.69 8294.81,-108.69 8310,-93.5 8890,-93.5 8912,-115.5 9476.19,-115.5 9502.03,-141.34 9717.56,-141.34 9740.4,-118.5 10001.12,-118.5 10030.96,-148.34 10167.52,-148.34 10197.37,-118.5 10542,-118.5 10558,-134.5 10700.48,-134.5 10713.48,-121.5 10763.76,-121.5 10771.76,-129.5 11732.22,-129.5 11747.22,-114.5 v1(12216.22,-114.5) 12225.22,-105.5 12687.68,-105.5 12723.99,-141.81 12736.81,-141.81 pad.@12744,-149 12799,-149 ; pad.@13699,-134 13993.61,-134 14013.11,-114.5 14439.58,-114.5 14453.58,-100.5 14512.05,-100.5 14537.89,-126.34 14753.42,-126.34 14776.26,-103.5 15036.98,-103.5 15066.83,-133.34 15203.39,-133.34 15233.23,-103.5 15577.87,-103.5 15593.87,-119.5 15736.35,-119.5 15749.35,-106.5 15799.62,-106.5 15807.62,-114.5 16768.09,-114.5 16783.09,-99.5 v1(17252.09,-99.5) 17261.09,-90.5 17440.58,-90.5 17446.58,-84.5 17446.86,-84.5 17457.86,-73.5 18157.37,-73.5 18198.37,-114.5 18830.62,-114.5 18842.46,-126.34 19057.99,-126.34 19080.83,-103.5 19341.55,-103.5 19371.4,-133.34 19507.96,-133.34 19537.8,-103.5 19882.44,-103.5 19898.44,-119.5 20040.92,-119.5 20053.92,-106.5 20104.19,-106.5 20112.19,-114.5 21072.66,-114.5 21087.66,-99.5 v1(21556.66,-99.5) 21562.47,-93.69 21939.81,-93.69 21955,-78.5 22535,-78.5 22557,-100.5 23121.19,-100.5 23147.03,-126.34 23362.56,-126.34 23385.4,-103.5 23646.12,-103.5 23675.96,-133.34 23812.52,-133.34 23842.37,-103.5 24187,-103.5 24203,-119.5 24345.48,-119.5 24358.48,-106.5 24408.76,-106.5 24416.76,-114.5 25377.22,-114.5 25392.22,-99.5 v1(25861.22,-99.5) 25870.22,-90.5 26332.68,-90.5 26368.99,-126.81 26381.81,-126.81 pad.@26389,-134 26444,-134
  Bottom Layer w15: 12799,-149 pad.@12909,-149 ; 26444,-134 pad.@26554,-134
L7: LED3_1.6 LED3_1_1.6 LED3_1_1_1.6 LED3_1_2.6 LED3_1_2_1.6 LED3_1_3.6 pad.@89,-126 pad.@12779,-126 pad.@12944,-126 pad.@13569,-111 pad.@13734,-111 pad.@26424,-111 pad.@26589,-111 pad.@-76,-126 | length 28396.6
  Top Layer w10: 39,-126 pad.@89,-126 ; LED3_1_2.6@2984.07,83.08 3095.42,83.08 3118.09,60.41 v1(3118.09,-98.5) ; LED3_1_1.6@7288.63,83.08 7399.99,83.08 7422.66,60.41 v1(7422.66,-98.5) ; LED3_1.6@11593.2,83.08 11704.56,83.08 11727.22,60.41 v1(11727.22,-98.5) ; 13684,-111 pad.@13734,-111 ; LED3_1_2_1.6@16629.07,98.08 16740.42,98.08 16763.09,75.41 v1(16763.09,-83.5) ; LED3_1_1_1.6@20933.63,98.08 21044.99,98.08 21067.66,75.41 v1(21067.66,-83.5) ; LED3_1_3.6@25238.2,98.08 25349.56,98.08 25372.22,75.41 v1(25372.22,-83.5)
  Top Layer w15: pad.@-76,-126 39,-126 ; pad.@13569,-111 13684,-111
  Bottom Layer w10: pad.@89,-126 330.61,-126 343.11,-113.5 787.95,-113.5 801.95,-99.5 873.68,-99.5 899.52,-125.34 1101.79,-125.34 1124.64,-102.5 1398.61,-102.5 1428.45,-132.34 1551.76,-132.34 1581.6,-102.5 1939.49,-102.5 1955.49,-118.5 2084.72,-118.5 2097.72,-105.5 2161.25,-105.5 2169.25,-113.5 3103.09,-113.5 v1(3118.09,-98.5) 3127.09,-89.5 3788.95,-89.5 3794.95,-83.5 3795.24,-83.5 3806.24,-72.5 4519,-72.5 4560,-113.5 5192.25,-113.5 5204.09,-125.34 5406.36,-125.34 5429.2,-102.5 5703.18,-102.5 5733.02,-132.34 5856.33,-132.34 5886.17,-102.5 6244.06,-102.5 6260.06,-118.5 6389.29,-118.5 6402.29,-105.5 6465.82,-105.5 6473.82,-113.5 7407.66,-113.5 v1(7422.66,-98.5) 7433.66,-87.5 8290.96,-87.5 8303.96,-74.5 8895.12,-74.5 8920.12,-99.5 9482.82,-99.5 9508.66,-125.34 9710.93,-125.34 9733.77,-102.5 10007.75,-102.5 10037.59,-132.34 10160.9,-132.34 10190.74,-102.5 10548.63,-102.5 10564.63,-118.5 10693.86,-118.5 10706.86,-105.5 10770.38,-105.5 10778.38,-113.5 11712.22,-113.5 v1(11727.22,-98.5) 11736.22,-89.5 12694.3,-89.5 12730.61,-125.81 12778.81,-125.81 pad.@12779,-126 ; 12894,-126 pad.@12944,-126 ; pad.@13734,-111 13975.61,-111 13988.11,-98.5 14432.95,-98.5 14446.95,-84.5 14518.68,-84.5 14544.52,-110.34 14746.79,-110.34 14769.64,-87.5 15043.61,-87.5 15073.45,-117.34 15196.76,-117.34 15226.6,-87.5 15584.49,-87.5 15600.49,-103.5 15729.72,-103.5 15742.72,-90.5 15806.25,-90.5 15814.25,-98.5 16748.09,-98.5 v1(16763.09,-83.5) 16772.09,-74.5 17433.95,-74.5 17439.95,-68.5 17440.24,-68.5 17451.24,-57.5 18164,-57.5 18205,-98.5 18837.25,-98.5 18849.09,-110.34 19051.36,-110.34 19074.2,-87.5 19348.18,-87.5 19378.02,-117.34 19501.33,-117.34 19531.17,-87.5 19889.06,-87.5 19905.06,-103.5 20034.29,-103.5 20047.29,-90.5 20110.82,-90.5 20118.82,-98.5 21052.66,-98.5 v1(21067.66,-83.5) 21078.66,-72.5 21935.96,-72.5 21948.96,-59.5 22540.12,-59.5 22565.12,-84.5 23127.82,-84.5 23153.66,-110.34 23355.93,-110.34 23378.77,-87.5 23652.75,-87.5 23682.59,-117.34 23805.9,-117.34 23835.74,-87.5 24193.63,-87.5 24209.63,-103.5 24338.86,-103.5 24351.86,-90.5 24415.38,-90.5 24423.38,-98.5 25357.22,-98.5 v1(25372.22,-83.5) 25381.22,-74.5 26339.3,-74.5 26375.61,-110.81 26423.81,-110.81 pad.@26424,-111 ; 26539,-111 pad.@26589,-111
  Bottom Layer w15: pad.@12779,-126 12894,-126 ; pad.@26424,-111 26539,-111
L8: LED3_1.4 LED3_1_1.4 LED3_1_1_1.4 LED3_1_2.4 LED3_1_2_1.4 LED3_1_3.4 pad.@54,-103 pad.@12744,-103 pad.@12909,-103 pad.@13534,-88 pad.@13699,-88 pad.@26389,-88 pad.@26554,-88 pad.@-111,-103 | length 28392.2
  Top Layer w10: pad.@-111,-103 -56,-103 ; LED3_1_2.4@2923.04,83.08 2923.04,33.46 2935,21.5 3057.05,21.5 3080.84,-2.29 3080.84,-81.26 v1(3082.09,-82.5) ; LED3_1_1.4@7227.61,83.08 7227.61,33.46 7239.57,21.5 7361.62,21.5 7385.41,-2.29 7385.41,-81.26 v1(7386.66,-82.5) ; LED3_1.4@11532.18,83.08 11532.18,33.46 11544.14,21.5 11666.19,21.5 11689.98,-2.29 11689.98,-81.26 v1(11691.22,-82.5) ; pad.@13534,-88 13589,-88 ; LED3_1_2_1.4@16568.04,98.08 16568.04,48.46 16580,36.5 16702.05,36.5 16725.84,12.71 16725.84,-66.26 v1(16727.09,-67.5) ; LED3_1_1_1.4@20872.61,98.08 20872.61,48.46 20884.57,36.5 21006.62,36.5 21030.41,12.71 21030.41,-66.26 v1(21031.66,-67.5) ; LED3_1_3.4@25177.18,98.08 25177.18,48.46 25189.14,36.5 25311.19,36.5 25334.98,12.71 25334.98,-66.26 v1(25336.22,-67.5)
  Top Layer w15: -56,-103 pad.@54,-103 ; 13589,-88 pad.@13699,-88
  Bottom Layer w10: pad.@54,-103 330.98,-103 336.48,-97.5 781.32,-97.5 795.32,-83.5 880.31,-83.5 906.15,-109.34 1095.17,-109.34 1118.01,-86.5 1405.24,-86.5 1435.08,-116.34 1545.13,-116.34 1574.97,-86.5 1946.12,-86.5 1962.12,-102.5 2078.09,-102.5 2091.09,-89.5 2167.88,-89.5 2175.88,-97.5 3067.09,-97.5 v1(3082.09,-82.5) 3093.09,-71.5 3784.32,-71.5 3788.32,-67.5 3788.61,-67.5 3799.61,-56.5 4526.35,-56.5 4567.35,-97.5 5198.87,-97.5 5210.72,-109.34 5399.73,-109.34 5422.58,-86.5 5709.81,-86.5 5739.65,-116.34 5849.7,-116.34 5879.54,-86.5 6250.69,-86.5 6266.69,-102.5 6382.66,-102.5 6395.66,-89.5 6472.44,-89.5 6480.44,-97.5 7371.66,-97.5 v1(7386.66,-82.5) 7397.66,-71.5 8284.33,-71.5 8297.33,-58.5 8901.75,-58.5 8926.75,-83.5 9489.44,-83.5 9515.28,-109.34 9704.3,-109.34 9727.14,-86.5 10014.38,-86.5 10044.22,-116.34 10154.27,-116.34 10184.11,-86.5 10555.26,-86.5 10571.26,-102.5 10687.23,-102.5 10700.23,-89.5 10777.01,-89.5 10785.01,-97.5 11676.22,-97.5 v1(11691.22,-82.5) 11702.22,-71.5 12699.68,-71.5 12723.99,-95.81 12736.81,-95.81 pad.@12744,-103 12799,-103 ; pad.@13699,-88 13975.98,-88 13981.48,-82.5 14426.32,-82.5 14440.32,-68.5 14525.31,-68.5 14551.15,-94.34 14740.17,-94.34 14763.01,-71.5 15050.24,-71.5 15080.08,-101.34 15190.13,-101.34 15219.97,-71.5 15591.12,-71.5 15607.12,-87.5 15723.09,-87.5 15736.09,-74.5 15812.88,-74.5 15820.88,-82.5 16712.09,-82.5 v1(16727.09,-67.5) 16738.09,-56.5 17429.32,-56.5 17433.32,-52.5 17433.61,-52.5 17444.61,-41.5 18171.35,-41.5 18212.35,-82.5 18843.87,-82.5 18855.72,-94.34 19044.73,-94.34 19067.58,-71.5 19354.81,-71.5 19384.65,-101.34 19494.7,-101.34 19524.54,-71.5 19895.69,-71.5 19911.69,-87.5 20027.66,-87.5 20040.66,-74.5 20117.44,-74.5 20125.44,-82.5 21016.66,-82.5 v1(21031.66,-67.5) 21042.66,-56.5 21929.33,-56.5 21942.33,-43.5 22546.75,-43.5 22571.75,-68.5 23134.44,-68.5 23160.28,-94.34 23349.3,-94.34 23372.14,-71.5 23659.38,-71.5 23689.22,-101.34 23799.27,-101.34 23829.11,-71.5 24200.26,-71.5 24216.26,-87.5 24332.23,-87.5 24345.23,-74.5 24422.01,-74.5 24430.01,-82.5 25321.22,-82.5 v1(25336.22,-67.5) 25347.22,-56.5 26344.68,-56.5 26368.99,-80.81 26381.81,-80.81 pad.@26389,-88 26444,-88
  Bottom Layer w15: 12799,-103 pad.@12909,-103 ; 26444,-88 pad.@26554,-88
L9: LED3_1.2 LED3_1_1.2 LED3_1_1_1.2 LED3_1_2.2 LED3_1_2_1.2 LED3_1_3.2 pad.@89,-80 pad.@12779,-80 pad.@12944,-80 pad.@13569,-65 pad.@13734,-65 pad.@26424,-65 pad.@26589,-65 pad.@-76,-80 | length 28240.6
  Top Layer w10: 39,-80 pad.@89,-80 ; LED3_1_2.2@2862.02,83.08 2861.84,82.9 2861.84,28.41 2892.84,-2.59 2977.18,-2.59 v1(3039.09,-64.5) ; LED3_1_1.2@7166.59,83.08 7166.41,82.9 7166.41,28.41 7197.41,-2.59 7281.75,-2.59 v1(7343.66,-64.5) ; LED3_1.2@11471.16,83.08 11470.98,82.9 11470.98,28.41 11501.98,-2.59 11586.31,-2.59 v1(11648.22,-64.5) ; 13684,-65 pad.@13734,-65 ; LED3_1_2_1.2@16507.02,98.08 16506.84,97.9 16506.84,43.41 16537.84,12.41 16622.18,12.41 v1(16684.09,-49.5) ; LED3_1_1_1.2@20811.59,98.08 20811.41,97.9 20811.41,43.41 20842.41,12.41 20926.75,12.41 v1(20988.66,-49.5) ; LED3_1_3.2@25116.16,98.08 25115.98,97.9 25115.98,43.41 25146.98,12.41 25231.31,12.41 v1(25293.22,-49.5)
  Top Layer w15: pad.@-76,-80 39,-80 ; pad.@13569,-65 13684,-65
  Bottom Layer w10: pad.@-76,-80 pad.@-74.5,-81.5 ; pad.@89,-80 90.5,-81.5 774.7,-81.5 788.7,-67.5 886.93,-67.5 912.78,-93.34 1088.54,-93.34 1111.38,-70.5 1411.87,-70.5 1441.71,-100.34 1538.5,-100.34 1568.35,-70.5 1952.75,-70.5 1967.75,-85.5 2072.47,-85.5 2084.47,-73.5 2174.5,-73.5 2182.5,-81.5 2737,-81.5 2763,-55.5 2975,-55.5 2984,-64.5 v1(3039.09,-64.5) 3048.09,-55.5 3777.7,-55.5 3781.7,-51.5 3781.98,-51.5 3792.98,-40.5 4532.98,-40.5 4573.98,-81.5 5205.5,-81.5 5217.34,-93.34 5393.11,-93.34 5415.95,-70.5 5716.44,-70.5 5746.28,-100.34 5843.07,-100.34 5872.92,-70.5 6257.32,-70.5 6272.32,-85.5 6377.03,-85.5 6389.03,-73.5 6479.07,-73.5 6487.07,-81.5 6851.57,-81.5 6855.76,-77.31 6926.36,-77.31 6948.17,-55.5 7334.66,-55.5 v1(7343.66,-64.5) 7352.66,-55.5 8277.7,-55.5 8290.7,-42.5 8908.37,-42.5 8933.37,-67.5 9496.07,-67.5 9521.91,-93.34 9697.67,-93.34 9720.52,-70.5 10021,-70.5 10050.85,-100.34 10147.64,-100.34 10177.48,-70.5 10561.89,-70.5 10576.89,-85.5 10681.6,-85.5 10693.6,-73.5 10783.64,-73.5 10791.64,-81.5 11156.14,-81.5 11160.33,-77.31 11230.93,-77.31 11252.74,-55.5 11639.22,-55.5 v1(11648.22,-64.5) 11657.22,-55.5 12706.3,-55.5 12730.61,-79.81 12778.81,-79.81 pad.@12779,-80 pad.@12780.5,-81.5 ; 12894,-80 pad.@12944,-80 pad.@12945.5,-81.5 ; pad.@13569,-65 pad.@13570.5,-66.5 ; pad.@13734,-65 13735.5,-66.5 14419.7,-66.5 14433.7,-52.5 14531.93,-52.5 14557.78,-78.34 14733.54,-78.34 14756.38,-55.5 15056.87,-55.5 15086.71,-85.34 15183.5,-85.34 15213.35,-55.5 15597.75,-55.5 15612.75,-70.5 15717.47,-70.5 15729.47,-58.5 15819.5,-58.5 15827.5,-66.5 16382,-66.5 16408,-40.5 16620,-40.5 16629,-49.5 v1(16684.09,-49.5) 16693.09,-40.5 17422.7,-40.5 17426.7,-36.5 17426.98,-36.5 17437.98,-25.5 18177.98,-25.5 18218.98,-66.5 18850.5,-66.5 18862.34,-78.34 19038.11,-78.34 19060.95,-55.5 19361.44,-55.5 19391.28,-85.34 19488.07,-85.34 19517.92,-55.5 19902.32,-55.5 19917.32,-70.5 20022.03,-70.5 20034.03,-58.5 20124.07,-58.5 20132.07,-66.5 20496.57,-66.5 20500.76,-62.31 20571.36,-62.31 20593.17,-40.5 20979.66,-40.5 v1(20988.66,-49.5) 20997.66,-40.5 21922.7,-40.5 21935.7,-27.5 22553.37,-27.5 22578.37,-52.5 23141.07,-52.5 23166.91,-78.34 23342.67,-78.34 23365.52,-55.5 23666,-55.5 23695.85,-85.34 23792.64,-85.34 23822.48,-55.5 24206.89,-55.5 24221.89,-70.5 24326.6,-70.5 24338.6,-58.5 24428.64,-58.5 24436.64,-66.5 24801.14,-66.5 24805.33,-62.31 24875.93,-62.31 24897.74,-40.5 25284.22,-40.5 v1(25293.22,-49.5) 25302.22,-40.5 26351.3,-40.5 26375.61,-64.81 26423.81,-64.81 pad.@26424,-65 pad.@26425.5,-66.5 ; 26539,-65 pad.@26589,-65 pad.@26590.5,-66.5
  Bottom Layer w15: pad.@12779,-80 12894,-80 ; pad.@26424,-65 26539,-65